# Altium PCB 555-indicator-PCB.PcbDoc
Units mil, origin at the board's own origin, x right, y up, seen from the top; angles counter-clockwise.
Board outline 1800 x 800 mil, 2 copper layers (Top Layer, Bottom Layer); 21 components, 16 nets, 53 pads, 9 vias.
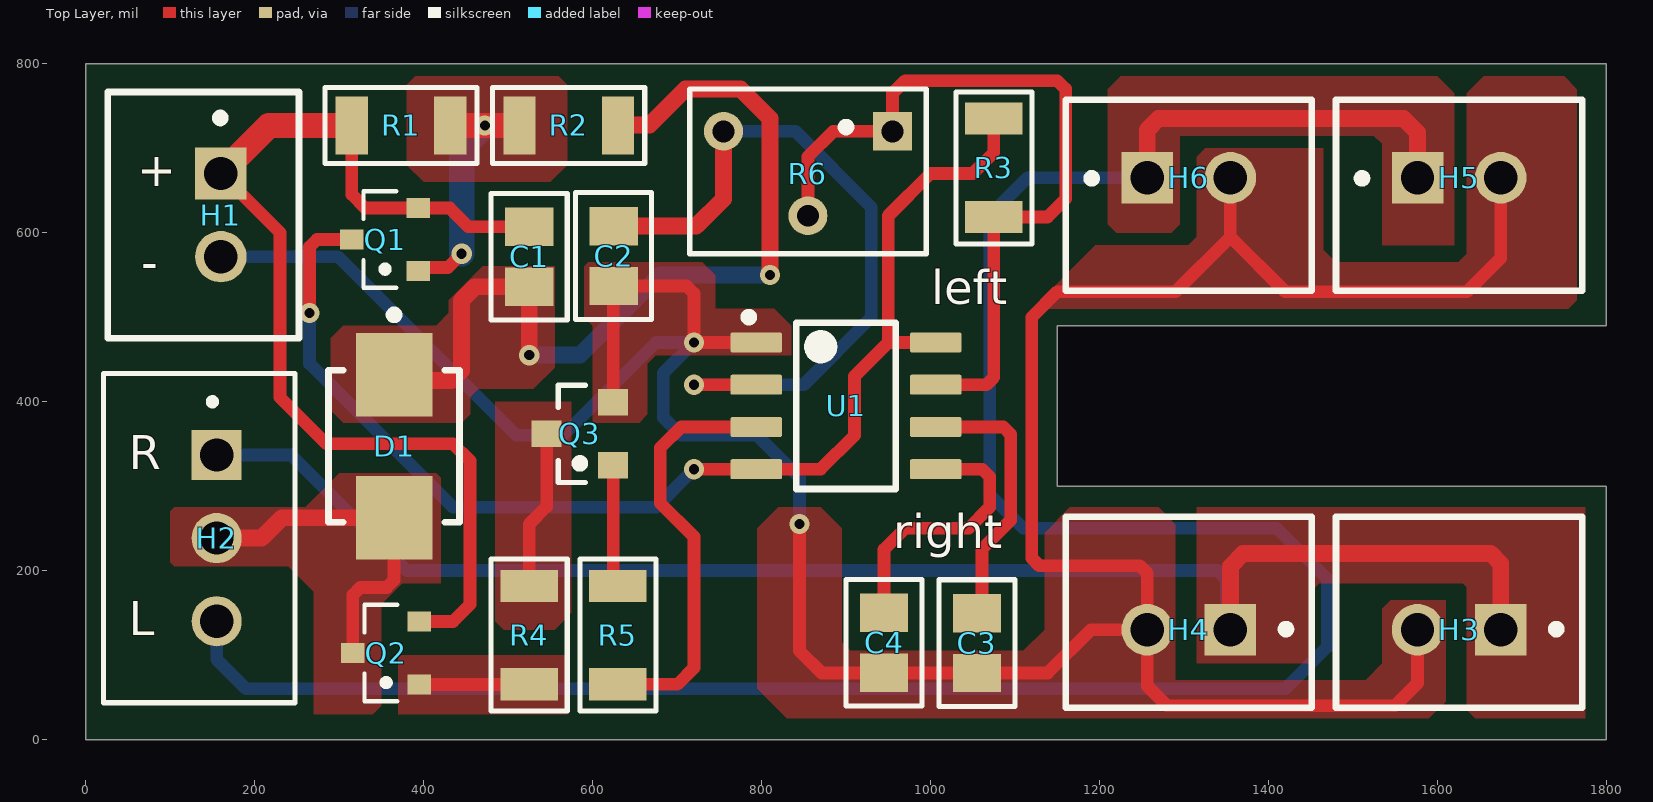
[diagram p0: Top Layer view]
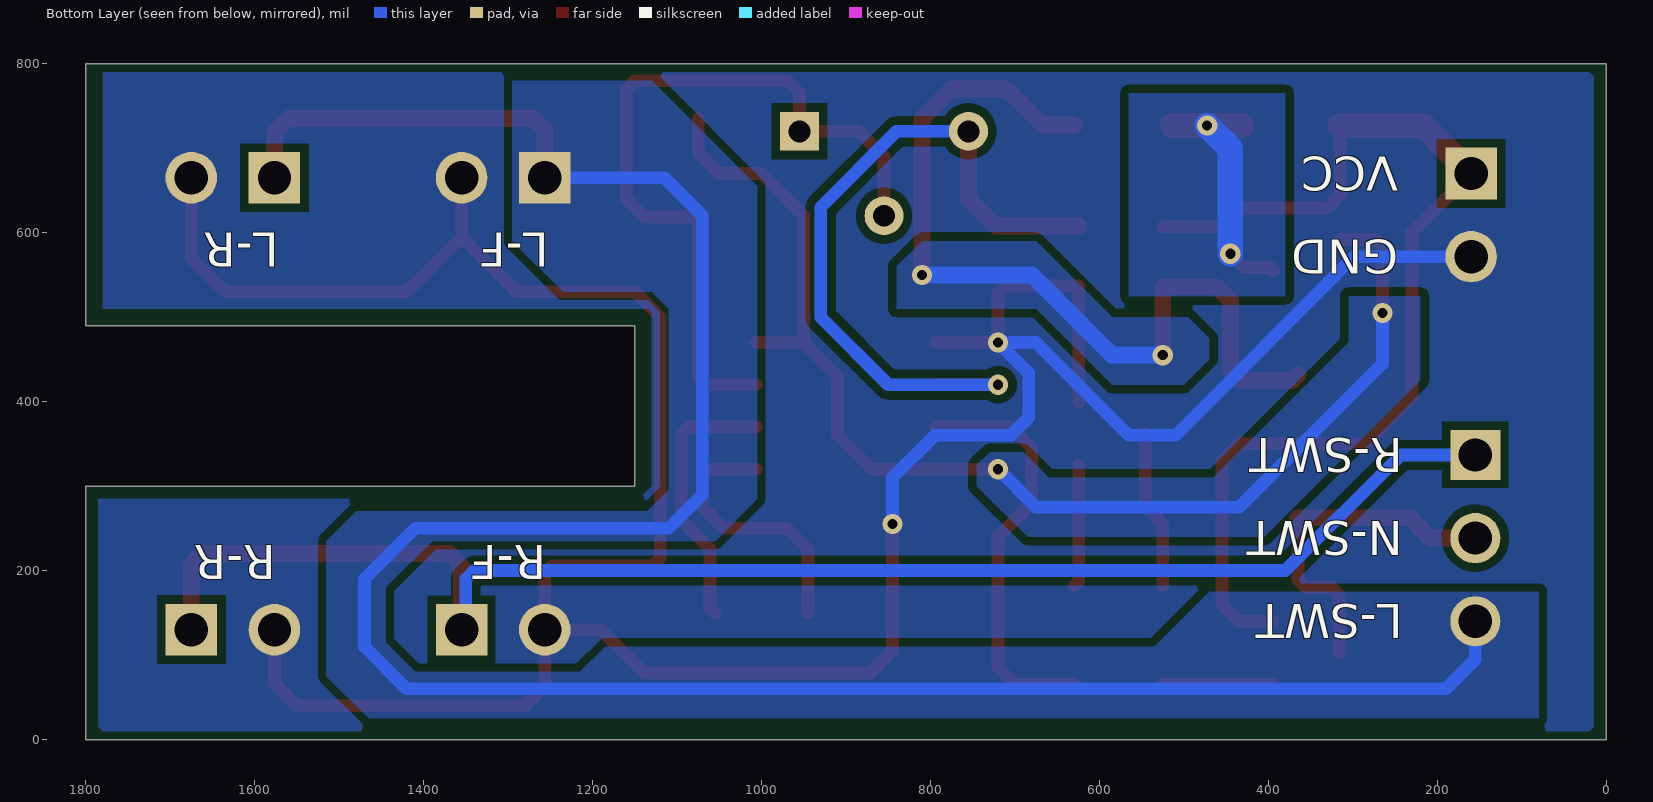
[diagram p1: Bottom Layer view, seen from below]
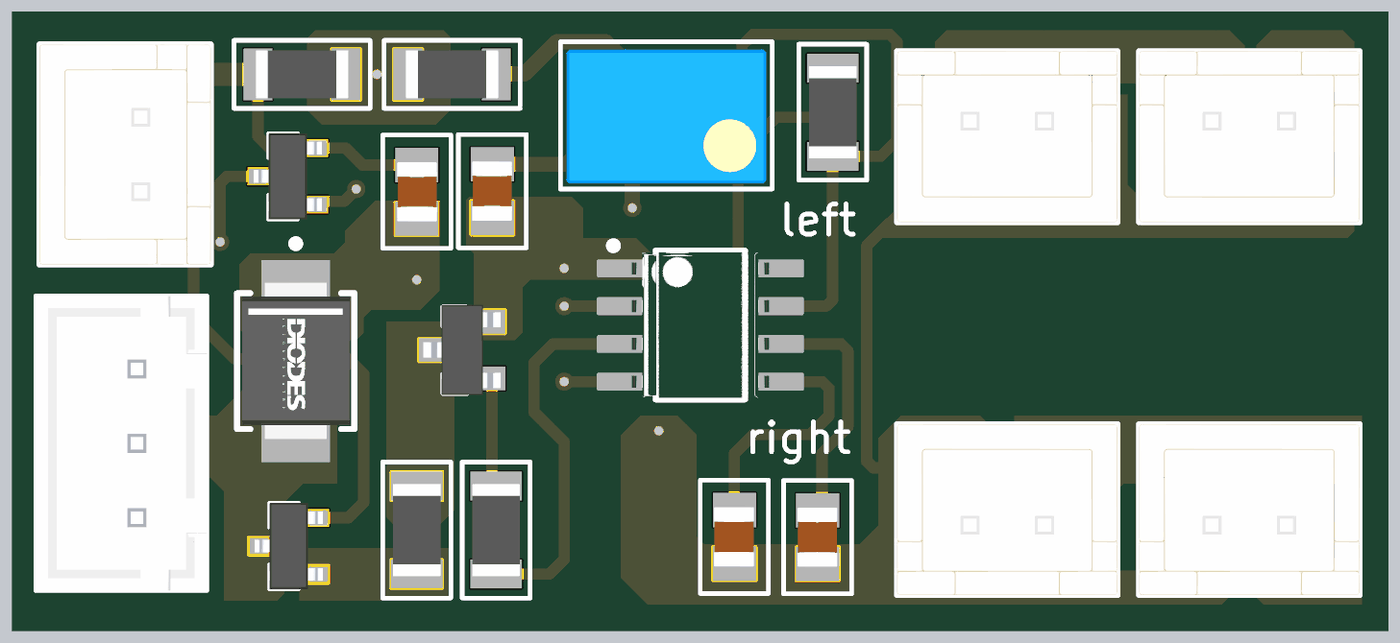
[diagram p2: 3D render of the assembled board from above, using the file's embedded part models]

## Layer stack, top to bottom
Top Solder: solder mask 0.4, Solder Resist, Dk 3.5
Top Layer: signal copper 1.4
Dielectric 1: dielectric 12.6, FR-4, Dk 4.8
Bottom Layer: signal copper 1.4
Bottom Solder: solder mask 0.4, Solder Resist, Dk 3.5

## Board outline
1800,490 1150,490 1150,300 1800,300 1800,0 0,0 0,800 1800,800

## Design rules (kind name [scope] priority, off if disabled: settings)
Clearance [All] p1: gap=10 ignorepadtopadclearanceinfootprint=FALSE
PlaneConnect [All] p1: pad.planeconnectstyle=Relief pad.reliefexpansion=20 pad.reliefentries=4 pad.reliefconductorwidth=10 pad.reliefairgap=10 via.planeconnectstyle=Direct via.reliefexpansion=20 via.reliefentries=4 via.reliefconductorwidth=10 via.reliefairgap=10
PolygonConnect [All] p1: connectstyle=Direct reliefconductorwidth=10 reliefentries=4 polygonreliefangle="90 Angle" airgapwidth=10
RoutingVias [All] p1: holewidth=12 width=24 viastyle="Through Hole" minholewidth=12 minwidth=24 maxholewidth=12 maxwidth=24
SilkToSolderMaskClearance [IsPad] p1: minsilkscreentomaskgap=6 clearancetoexposedcopper=TRUE
SolderMaskExpansion [All] p1: expansion=2 istentingtop=FALSE
SupplyNets "Schematic Supply Nets" [InNet('GND')] p1: voltage=0.000
Width [All] p1: maxlimit=100 minlimit=6 preferedwidth=10 minimp=50.000000 maximp=50.000000 favimp=50.000000
28 further rules are at their usual default settings.

## Components (designator, comment, footprint, x,y, rotation, side; value= is the part's Value field where it differs from the comment)
C1 "10uf, 10V" CAPC2012X140N 525,571.42 r90 top locked value=10uF
C2 "1uF, 25V" CAPC2012X140N 625,572.28 r270 top locked value=1uF
C3 "1uF, 25V" CAPC2012X140N 1055,114.13 r270 top value=1uF
C4 "1uF, 25V" CAPC2012X140N 945,114.57 r270 top value=1uF
D1 "S1AB-13-F" FP-SMB-MFG 365,347.2 r270 top locked
H1 "JST" FP-B2B-XH-A_LF_SN-MFG 139.33,620.79 r270 top
H2 "Rotary SWT" JST_B3B-XH-A 134.33,238.43 r90 top
H3 "JST" FP-B2B-XH-A_LF_SN-MFG 1625.79,150.67 r180 top locked
H4 "JST" FP-B2B-XH-A_LF_SN-MFG 1305.79,150.67 r180 top locked
H5 "JST" FP-B2B-XH-A_LF_SN-MFG 1625.79,644.33 r0 top locked
H6 "JST" FP-B2B-XH-A_LF_SN-MFG 1305.79,644.33 r0 top locked
Q1 "BC857B" PNP_BC857B,235 354.37,591.85 r180 top locked
Q2 "BC857B" PNP_BC857B,235 355.63,102.4 r180 top
Q3 "BCX19LT1G" NPN_BCX19LT1G 585,361.85 r180 top
R1 "39K" RESC3116X65N 373.27,726.85 r0 top
R2 "12K" RESC3116X65N 571.73,726.85 r0 top value=12kR
R3 "50K" RESC3116X65N 1075,676.73 r270 top value=50kR
R4 "47R" RESC3116X65N 525,123.58 r270 top
R5 "47R" RESC3116X65N 630,123.58 r90 top
R6 "50K" TRIM_3266W-1-503LF 855,720 r180 top value=50kR
U1 "NE555DR" FP-D0008A-MFG 900,395 r0 top

## Footprints (in the part's own frame and the unit in brackets; to place one, negate y for a bottom-side part, rotate by r counter-clockwise, add the part's x,y. Pads: shape width x height; smd on the part's side, far side on the other; paste and mask are expansions set on the pad)
CAPC2012X140N [mm]
  rect 1.15x1.45 smd: 1(-0.9,0) 2(0.9,0)
  silkscreen extent -1.9,-1.14 1.91,1.14, body extent -1,-0.69 1,0.66, height 1.26
FP-B2B-XH-A_LF_SN-MFG [mm]
  rect 1.55x1.55 hole 1 paste-2539.97 mask+0: 1(-1.25,0.525)
  round 1.55 hole 1 paste-2539.97 mask+0: 2(1.25,0.525)
  silkscreen extent -3.7,-2.88 3.7,2.88, body extent -3.7,-2.88 3.7,2.88, height 7
FP-D0008A-MFG [mm]
  rrect17% 1.55x0.6 smd paste+0 mask+0: 1(-2.7,1.905) 2(-2.7,0.635) 3(-2.7,-0.635) 4(-2.7,-1.905) 5(2.7,-1.905) 6(2.7,-0.635) 7(2.7,0.635) 8(2.7,1.905)
  silkscreen extent -3.05,-2.5 1.5,2.79, body extent -3.57,-2.75 3.57,2.75, height 0.25
FP-SMB-MFG [mm]
  rect 2.5x2.3 smd paste+0 mask+0: 1(-2.15,0) 2(2.15,0)
  silkscreen extent -4.07,-1.97 2.28,1.97, body extent -3.5,-2.07 3.5,2.07, height 0.25
JST_B3B-XH-A [mm]
  rect 1.508x1.508 / inner round 1.508 / far side rect 1.508x1.508 hole 1: 1(2.5,-0.525)
  round 1.508 hole 1: 2(0,-0.525) 3(-2.5,-0.525)
  silkscreen extent -4.95,-2.88 4.95,2.88, body extent -4.95,-2.88 4.95,2.88, height 7
NPN_BCX19LT1G [mm] "SOT23, 3-Leads, Body 2.92x1.3mm, Pitch 0.95mm"
  rect 0.9x0.8 smd: 1(-1,0.95) 2(-1,-0.95) 3(1,0)
  silkscreen extent -0.17,-1.46 0.65,1.46, body extent -1.3,-1.53 1.3,1.52, height 1.3
PNP_BC857B,235 [mm]
  rect 0.7x0.6 smd paste-0.05: 1(-1,0.95) 2(-1,-0.95) 3(1,0)
  silkscreen extent -0.34,-1.45 0.65,1.45, body extent -1.15,-1.45 1.15,1.45, height 1.1
RESC3116X65N [mm]
  rect 0.97x1.73 smd: 1(-1.48,0) 2(1.48,0)
  silkscreen extent -2.29,-1.14 2.29,1.14, body extent -1.55,-0.8 1.55,0.8, height 0.65
TRIM_3266W-1-503LF [mm]
  rect 1.168x1.168 hole 0.66: 1(-2.54,0)
  round 1.168 hole 0.66: 2(0,2.54) 3(2.54,0)
  silkscreen extent -3.56,-1.27 3.56,3.68, body extent -3.35,-1.01 3.35,3.49, height 8.76

## Part data
C1: library part CL21A106KPFNNNE, "CAP CER 10UF 10V X5R 0805", Capacitor Type=Ceramic, Case/Package=0805, LCSC part no=C17024, Manufacturer=Samsung, Max Operating Temperature=85°C, Min Operating Temperature=-55°C, Package Shape=Rectangular, Package Style=SMTMeter, Rated DC Voltage (URdc)=10V, Supplier Part Number=1276-1052-6-ND, Temperature Characteristics Code=X5R, Tolerance  (fill in as +-)=10%, Category="Ceramic Capacitors", ComponentLink1Description=https://datasheet.ciiva.com:443/pdfs/VipMasterIC/IC/SEMS/SEMS-S-A0008526420/SEMS-S-A0008526398-1.pdf?src-supplier=IHS+Markit, ComponentLink1URL=https://datasheet.ciiva.com:443/pdfs/VipMasterIC/IC/SEMS/SEMS-S-A0008526420/SEMS-S-A0008526398-1.pdf?src-supplier=IHS+Markit, ComponentLink2Description=https://datasheet.ciiva.com/16199/cl05b104kq5nnnc-16199024.pdf?src-supplier=Future+Electronics, ComponentLink2URL=https://datasheet.ciiva.com/16199/cl05b104kq5nnnc-16199024.pdf?src-supplier=Future+Electronics, ComponentLink3Description=https://datasheet.ciiva.com/15195/getdatasheetpartid-357423-15195857.pdf?src-supplier=Verical, ComponentLink3URL=https://datasheet.ciiva.com/15195/getdatasheetpartid-357423-15195857.pdf?src-supplier=Verical, ComponentLink4Description=https://datasheet.octopart.com/CL21A106KPFNNNE-Samsung-Electro-Mechanics-datasheet-136031801.pdf?src-supplier=Farnell, ComponentLink4URL=https://datasheet.octopart.com/CL21A106KPFNNNE-Samsung-Electro-Mechanics-datasheet-136031801.pdf?src-supplier=Farnell, ComponentLink5Description=https://datasheet.octopart.com/CL21A106KPFNNNE-Samsung-Electro-Mechanics-datasheet-8324245.pdf, ComponentLink5URL=https://datasheet.octopart.com/CL21A106KPFNNNE-Samsung-Electro-Mechanics-datasheet-8324245.pdf, ComponentLink6Description=https://datasheet.octopart.com/CL21A106KPFNNNE-Samsung-Electro-Mechanics-datasheet-97040617.pdf, ComponentLink6URL=https://datasheet.octopart.com/CL21A106KPFNNNE-Samsung-Electro-Mechanics-datasheet-97040617.pdf, ComponentLink7Description=https://datasheet.octopart.com/General-Multilayer-Ceramic-Capacitors-Samsung-datasheet-family-111.pdf, ComponentLink7URL=https://datasheet.octopart.com/General-Multilayer-Ceramic-Capacitors-Samsung-datasheet-family-111.pdf, ComponentLink8Description=https://datasheet.octopart.com/CL21A106KPFNNNE-Samsung-Electro-Mechanics-datasheet-110326887.pdf?src-supplier=Future+Electronics, ComponentLink8URL=https://datasheet.octopart.com/CL21A106KPFNNNE-Samsung-Electro-Mechanics-datasheet-110326887.pdf?src-supplier=Future+Electronics, ComponentLink9Description=https://datasheet.octopart.com/CL21A106KPFNNNE-Samsung-Electro-Mechanics-datasheet-81462124.pdf?src-supplier=Future+Electronics, ComponentLink9URL=https://datasheet.octopart.com/CL21A106KPFNNNE-Samsung-Electro-Mechanics-datasheet-81462124.pdf?src-supplier=Future+Electronics, ComponentLink10Description=https://datasheet.octopart.com/CL21A106KPFNNNE-Samsung-datasheet-48647544.pdf?src-supplier=Future+Electronics, ComponentLink10URL=https://datasheet.octopart.com/CL21A106KPFNNNE-Samsung-datasheet-48647544.pdf?src-supplier=Future+Electronics, ComponentLink11Description=https://datasheet.octopart.com/CL21A106KPFNNNE-Samsung-datasheet-26669229.pdf?src-supplier=Future+Electronics, ComponentLink11URL=https://datasheet.octopart.com/CL21A106KPFNNNE-Samsung-datasheet-26669229.pdf?src-supplier=Future+Electronics, ComponentLink12Description=https://datasheet.octopart.com/CL21A106KPFNNNE-Samsung-datasheet-22147434.pdf?src-supplier=TME, ComponentLink12URL=https://datasheet.octopart.com/CL21A106KPFNNNE-Samsung-datasheet-22147434.pdf?src-supplier=TME, ComponentLink13Description=https://datasheet.octopart.com/CL21A106KPFNNNE-Samsung-Electro-Mechanics-datasheet-11781485.pdf?src-supplier=Arrow+Electronics, ComponentLink13URL=https://datasheet.octopart.com/CL21A106KPFNNNE-Samsung-Electro-Mechanics-datasheet-11781485.pdf?src-supplier=Arrow+Electronics, Dielectric Material=Ceramic, Height=1.35mm, JESD-609 Code=e3, Length=2mm, Manufacturer Part Number=CL21A106KPFNNNE, Mounting Technology="Surface Mount", Multilayer=Yes, Packaging="Tape and Reel", Pins=2, Pricing="1=0.1, 10=0.054, 50=0.0374, 100=0.0322, 500=0.02334, 1000=0.0206 (USD)", Reach SVHC Compliant=Yes, RoHS Compliant=Yes, Stock=539282, Supplier=Digikey, Terminal Finish=Nickel, Termination=Wraparound, Tolerance (fill in as +-)=10%, Width=1.25mm
C2 C3 C4: library part CL21B105KAFNNNE, "CAP CER 1UF 25V X7R 0805", Capacitor Type=Ceramic, Case/Package=0805, LCSC part no=C116352, Manufacturer=Samsung, Max Operating Temperature=125°C, Min Operating Temperature=-55°C, Package Shape=Rectangular, Package Style=SMTMeter, Rated DC Voltage (URdc)=25V, Supplier Part Number=1276-1066-6-ND, Temperature Characteristics Code=X7R, Tolerance  (fill in as +-)=10%, Category="Ceramic Capacitors", ComponentLink1Description=https://datasheet.ciiva.com:443/pdfs/VipMasterIC/IC/SEMS/SEMS-S-A0008523501/SEMS-S-A0008523563-1.pdf?src-supplier=IHS+Markit, ComponentLink1URL=https://datasheet.ciiva.com:443/pdfs/VipMasterIC/IC/SEMS/SEMS-S-A0008523501/SEMS-S-A0008523563-1.pdf?src-supplier=IHS+Markit, ComponentLink2Description=https://datasheet.ciiva.com/25800/cl21b105kafnnne-25800163.pdf?src-supplier=Digikey, ComponentLink2URL=https://datasheet.ciiva.com/25800/cl21b105kafnnne-25800163.pdf?src-supplier=Digikey, ComponentLink3Description=https://datasheet.ciiva.com/15195/getdatasheetpartid-355205-15195880.pdf?src-supplier=Verical, ComponentLink3URL=https://datasheet.ciiva.com/15195/getdatasheetpartid-355205-15195880.pdf?src-supplier=Verical, Dielectric Material=Ceramic, Height=1.35mm, JESD-609 Code=e3, Length=2mm, Manufacturer Part Number=CL21B105KAFNNNE, Mounting Technology="Surface Mount", Multilayer=Yes, Packaging="Tape and Reel", Pins=2, Pricing="1=0.08, 10=0.027, 50=0.022, 100=0.0168, 500=0.0152, 1000=0.0136 (USD)", Reach SVHC Compliant=Yes, RoHS=Yes, RoHS Compliant=Yes, Stock=1459194, Supplier=Digikey, Terminal Finish=Nickel, Termination=Wraparound, Tolerance (fill in as +-)=10%, Width=1.25mm
D1: "DIODE GEN PURP 50V 1A DO214AC", Forward Voltage=1.1V, LCSC part no=C519094, Manufacturer=Diodes, Max Operating Temperature=150°C, Max Output current=1A, Min Operating Temperature=-65°C, Non-rep Pk Forward Current-Max=30A, Package Body Material=Plastic, Package Shape=Rectangular, Package Style="SMALL OUTLINEMeter", Peak Reflow Temperature (Cel)=260°C, Rep Pk Reverse Voltage-Max=50V, Supplier Part Number=S1AB-FDICT-ND, Time @ Peak Reflow Temperature-Max (s)=40s, Additional Feature="HIGH RELIABILITY", Category="Rectifier Diodes", ComponentLink1Description=https://datasheet.ciiva.com:443/pdfs/VipMasterIC/IC/DIOD/DIOD-S-A0007810797/DIOD-S-A0007810797-1.pdf?src-supplier=IHS+Markit, ComponentLink1URL=https://datasheet.ciiva.com:443/pdfs/VipMasterIC/IC/DIOD/DIOD-S-A0007810797/DIOD-S-A0007810797-1.pdf?src-supplier=IHS+Markit, Diode Element Material=SILICON, Diode Type=RECTIFIER, JESD-30 Code=R-PDSO-C2, JESD-609 Code=e3, Manufacturer Part Number=S1AB-13-F, Moisture Sensitivity Level=1, Number of Elements=1, Pins=2, Pricing="1=0.18, 10=0.121, 100=0.0813, 500=0.06208, 1000=0.05559 (USD)", Qualification Status="Not Qualified", Reach SVHC Compliant=No, Reverse Recovery Time-Max=3us, RoHS=Yes, RoHS Compliant=Yes, Stock=182225, Supplier=Digikey, Surface Mount=Yes, Terminal Finish=Tin, Terminal Form="C BEND", Terminal Position=DUAL
H1 H3 H4 H5 H6: library part B2B-XH-A(LF)(SN), "CONN HEADER VERT 2POS 2.5MM", LCSC part no=C158012, Supplier Part Number=1638840, Category="Headers and Wire Housings", ComponentLink1Description=https://datasheet.ciiva.com/11746/0900766b8082653e-11746979.pdf?src-supplier=Rs, ComponentLink1URL=https://datasheet.ciiva.com/11746/0900766b8082653e-11746979.pdf?src-supplier=Rs, ComponentLink2Description=https://datasheet.ciiva.com/26894/getdatasheetpartid-640357-26894434.pdf?src-supplier=Verical, ComponentLink2URL=https://datasheet.ciiva.com/26894/getdatasheetpartid-640357-26894434.pdf?src-supplier=Verical, ComponentLink3Description=https://datasheet.ciiva.com/26894/getdatasheetpartid-385291-26894760.pdf?src-supplier=Verical, ComponentLink3URL=https://datasheet.ciiva.com/26894/getdatasheetpartid-385291-26894760.pdf?src-supplier=Verical, ComponentLink4Description=https://datasheet.ciiva.com/8052/5448-8052024.pdf?src-supplier=Element14, ComponentLink4URL=https://datasheet.ciiva.com/8052/5448-8052024.pdf?src-supplier=Element14, Manufacturer=JST, Manufacturer Part Number=B2B-XH-A(LF)(SN), Pricing="1=0.0563, 750=0.0541, 2500=0.0518, 7500=0.0498, 25000=0.0458 (USD)", RoHS=Yes, Stock=668373, Supplier="Future Electronics"
H2: library part B3B-XH-A(LF)(SN), "CONN HEADER VERT 3POS 2.5MM", LCSC part no=C144394, Manufacturer=JST, Supplier Part Number=8262735, Category="Headers and Wire Housings", ComponentLink1Description=https://datasheet.ciiva.com/11746/0900766b8082653f-11746520.pdf?src-supplier=Rs, ComponentLink1URL=https://datasheet.ciiva.com/11746/0900766b8082653f-11746520.pdf?src-supplier=Rs, ComponentLink2Description=https://datasheet.ciiva.com/26894/getdatasheetpartid-640434-26894454.pdf?src-supplier=Verical, ComponentLink2URL=https://datasheet.ciiva.com/26894/getdatasheetpartid-640434-26894454.pdf?src-supplier=Verical, ComponentLink3Description=https://datasheet.ciiva.com/26894/getdatasheetpartid-440399-26894778.pdf?src-supplier=Verical, ComponentLink3URL=https://datasheet.ciiva.com/26894/getdatasheetpartid-440399-26894778.pdf?src-supplier=Verical, Manufacturer Part Number=B3B-XH-A(LF)(SN), Pricing="1=0.0792, 500=0.0757, 1500=0.0727, 5000=0.0695, 15000=0.0637 (USD)", RoHS=Yes, Stock=57931, Supplier="Future Electronics"
Q1 Q2: "BJT SOT-23 45V 100MA", LCSC part no=C181146, Manufacturer=Infineon, Supplier Part Number=BC857BE6327HTSA1CT-ND, Manufacturer Part Number=BC857B, Pricing="1=0.23, 10=0.14, 100=0.0872, 500=0.06382, 1000=0.05625 (USD)", RoHS=Yes, Stock=18586, Supplier=Digikey
Q3: "TRANS NPN 45V 0.5A SOT23-3", Collector-emitter Voltage-Max=45V, DC Current Gain-Min (hFE)=40, LCSC part no=C232541, Manufacturer="ON Semiconductor", Max Collector Current=500mA, Max Operating Temperature=150°C, Package Body Material=Plastic, Package Shape=Rectangular, Package Style="SMALL OUTLINEMeter", Peak Reflow Temperature (Cel)=260°C, Power Dissipation-Max (Abs)=225mW, Supplier Part Number=BCX19LT1GOSCT-ND, Time @ Peak Reflow Temperature-Max (s)=40s, Category=BJTs, ComponentLink1Description=https://datasheet.ciiva.com:443/pdfs/VipMasterIC/IC/ONSM/ONSMS38866/ONSMS38866-1.pdf?src-supplier=IHS+Markit, ComponentLink1URL=https://datasheet.ciiva.com:443/pdfs/VipMasterIC/IC/ONSM/ONSMS38866/ONSMS38866-1.pdf?src-supplier=IHS+Markit, ComponentLink2Description=https://datasheet.ciiva.com/15138/getdatasheetpartid-38785-15138642.pdf?src-supplier=Verical, ComponentLink2URL=https://datasheet.ciiva.com/15138/getdatasheetpartid-38785-15138642.pdf?src-supplier=Verical, ComponentLink3Description=https://datasheet.ciiva.com/976/bcx17lt1-d-976538.pdf?src-supplier=Digikey, ComponentLink3URL=https://datasheet.ciiva.com/976/bcx17lt1-d-976538.pdf?src-supplier=Digikey, ComponentLink4Description=https://datasheet.ciiva.com/976/bcx17lt1-d-976539.pdf?src-supplier=Digikey, ComponentLink4URL=https://datasheet.ciiva.com/976/bcx17lt1-d-976539.pdf?src-supplier=Digikey, ComponentLink5Description=https://datasheet.ciiva.com/976/bcx17lt1-d-976540.pdf?src-supplier=Digikey, ComponentLink5URL=https://datasheet.ciiva.com/976/bcx17lt1-d-976540.pdf?src-supplier=Digikey, ComponentLink6Description=https://datasheet.ciiva.com/11204/bcx17lt1-d-11204428.pdf?src-supplier=Avnet, ComponentLink6URL=https://datasheet.ciiva.com/11204/bcx17lt1-d-11204428.pdf?src-supplier=Avnet, JEDEC-95 Code=TO-236AB, JESD-30 Code=R-PDSO-G3, JESD-609 Code=e3, Manufacturer Part Number=BCX19LT1G, Moisture Sensitivity Level=1, Number of Elements=1, Pins=3, Polarity/Channel Type=NPN, Pricing="1=0.12, 10=0.085, 100=0.0569, 500=0.04318, 1000=0.03851 (USD)", Qualification Status="Not Qualified", Reach SVHC Compliant=Yes, RoHS=Yes, RoHS Compliant=Yes, Stock=4512, Supplier=Digikey, Surface Mount=Yes, Terminal Finish=Tin, Terminal Form="Gull Wing", Terminal Position=DUAL, Transistor Element Material=SILICON
R1: library part ERJ-PB6B3902V, "Res SMD 39K Ohm 0.1% 1/4W 0805", LCSC part no=C4158317, Manufacturer=Panasonic, Supplier Part Number=P20774CT-ND, Category="Chip SMD Resistors", ComponentLink1Description=http://datasheet.octopart.com/ERJPB6B3902V-Panasonic-datasheet-82522998.pdf?src-supplier=Farnell, ComponentLink1URL=http://datasheet.octopart.com/ERJPB6B3902V-Panasonic-datasheet-82522998.pdf?src-supplier=Farnell, ComponentLink2Description=https://datasheet.octopart.com/ERJ-PB6B3902V-Panasonic-datasheet-82522998.pdf?src-supplier=Newark, ComponentLink2URL=https://datasheet.octopart.com/ERJ-PB6B3902V-Panasonic-datasheet-82522998.pdf?src-supplier=Newark, ComponentLink3Description=http://datasheet.octopart.com/ERJPB6B3902V-Panasonic-datasheet-82522998.pdf?src-supplier=Verical, ComponentLink3URL=http://datasheet.octopart.com/ERJPB6B3902V-Panasonic-datasheet-82522998.pdf?src-supplier=Verical, ComponentLink4Description=https://industrial.panasonic.com/cdbs/www-data/pdf/RDM0000/AOA0000C328.pdf?src-supplier=Digikey, ComponentLink4URL=https://industrial.panasonic.com/cdbs/www-data/pdf/RDM0000/AOA0000C328.pdf?src-supplier=Digikey, Manufacturer Part Number=ERJ-PB6B3902V, Pricing="1=0.29, 10=0.161, 25=0.1292, 50=0.1098, 100=0.0939, 250=0.07684, 500=0.06644, 1000=0.05775 (USD)", RoHS=Yes, Stock=9918, Supplier=Digikey
R2: library part ERJPB6B1202V, "RES SMD 12K OHM 0.1% 1/4W 0805", Case/Package=0805, LCSC part no=C413717, Manufacturer=Panasonic, Max Operating Temperature=155°C, Min Operating Temperature=-55°C, Package Height=0.6mm, Package Length=2mm, Package Width=1.25mm, Power=250mW, Rated Temperature=70°C, Resistor Type="FIXED RESISTOR", Supplier Part Number=P20716CT-ND, Temperature Coefficient=50ppm/°C, Tolerance=0.1%, Working Voltage=150V, Category="Chip SMD Resistors", ComponentLink1Description=https://datasheet.ciiva.com:443/pdfs/VipMasterIC/IC/PANA/PANA-S-A0009891633/PANA-S-A0009891633-1.pdf?src-supplier=IHS+Markit, ComponentLink1URL=https://datasheet.ciiva.com:443/pdfs/VipMasterIC/IC/PANA/PANA-S-A0009891633/PANA-S-A0009891633-1.pdf?src-supplier=IHS+Markit, ComponentLink2Description=https://datasheet.octopart.com/ERJPB6B1202V-Panasonic-datasheet-82522998.pdf?src-supplier=Newark, ComponentLink2URL=https://datasheet.octopart.com/ERJPB6B1202V-Panasonic-datasheet-82522998.pdf?src-supplier=Newark, ComponentLink3Description=https://industrial.panasonic.com/cdbs/www-data/pdf/RDM0000/AOA0000C328.pdf?src-supplier=Digikey, ComponentLink3URL=https://industrial.panasonic.com/cdbs/www-data/pdf/RDM0000/AOA0000C328.pdf?src-supplier=Digikey, ComponentLink4Description=https://datasheet.octopart.com/ERJPB6B1202V-Panasonic-datasheet-136610817.pdf?src-supplier=Newark, ComponentLink4URL=https://datasheet.octopart.com/ERJPB6B1202V-Panasonic-datasheet-136610817.pdf?src-supplier=Newark, ComponentLink5Description=https://datasheet.octopart.com/ERJPB6B1202V-Panasonic-datasheet-177212511.pdf?src-supplier=Burklin+Elektronik, ComponentLink5URL=https://datasheet.octopart.com/ERJPB6B1202V-Panasonic-datasheet-177212511.pdf?src-supplier=Burklin+Elektronik, Construction=Rectangular, Manufacturer Part Number=ERJPB6B1202V, Mounting Technology="Surface Mount", Packaging="Tape and Reel", Pins=2, Pricing="1=0.29, 10=0.161, 25=0.1292, 50=0.1098, 100=0.0939, 250=0.07684, 500=0.06644, 1000=0.05775 (USD)", Reach SVHC Compliant=Yes, Reference Standard=AEC-Q200, RoHS Compliant=Yes, Stock=15534, Supplier=Digikey, Technology="METAL GLAZE/THICK FILM", Termination=Wraparound
R3: library part RT1206BRD0750KL, "RES SMD 50K OHM 0.1% 1/4W 1206", Case/Package=1206, LCSC part no=C706417, Manufacturer=Yageo, Max Operating Temperature=155°C, Min Operating Temperature=-55°C, Package Shape=Rectangular, Power=250mW, Rated Temperature=70°C, Resistor Type="FIXED RESISTOR", Supplier Part Number=13-RT1206BRD0750KLCT-ND, Temperature Coefficient=25ppm/°C, Tolerance=0.1%, Working Voltage=200V, Additional Feature="LASER TRIMMABLE", Category="Chip SMD Resistors", ComponentLink1Description=https://datasheet.ciiva.com:443/pdfs/VipMasterIC/IC/YAGO/YAGO-S-A0003507815/YAGO-S-A0003507815-1.pdf?src-supplier=IHS+Markit, ComponentLink1URL=https://datasheet.ciiva.com:443/pdfs/VipMasterIC/IC/YAGO/YAGO-S-A0003507815/YAGO-S-A0003507815-1.pdf?src-supplier=IHS+Markit, ComponentLink2Description=https://datasheet.octopart.com/RT1206BRD0750KL-Yageo-datasheet-166250672.pdf?src-supplier=Future+Electronics, ComponentLink2URL=https://datasheet.octopart.com/RT1206BRD0750KL-Yageo-datasheet-166250672.pdf?src-supplier=Future+Electronics, ComponentLink3Description=http://www.yageo.com/documents/recent/PYu-RT_1-to-0.01_RoHS_L_8.pdf?src-supplier=Digikey, ComponentLink3URL=http://www.yageo.com/documents/recent/PYu-RT_1-to-0.01_RoHS_L_8.pdf?src-supplier=Digikey, Manufacturer Part Number=RT1206BRD0750KL, Mounting Technology="Surface Mount", Packaging="Tape and Reel", Pins=2, Pricing="1=0.34, 10=0.246, 50=0.1908, 100=0.1693, 500=0.1275, 1000=0.1122 (USD)", Reach SVHC Compliant=Yes, RoHS=Yes, RoHS Compliant=Yes, Stock=21777, Supplier=Digikey, Technology="THIN FILM", Termination=Wraparound
R4 R5: library part RPC0805JT47R0, "RES 47 OHM 5% 1/4W 0805", Case/Package=0805, LCS part no=C5869749, Manufacturer="Stackpole Electronics", Max Operating Temperature=155°C, Min Operating Temperature=-55°C, Package Height=0.5mm, Package Length=2mm, Package Shape=Rectangular, Package Width=1.25mm, Power=250mW, Rated Temperature=70°C, Resistor Type="FIXED RESISTOR", Supplier Part Number=RPC0805JT47R0DKR-ND, Temperature Coefficient=200ppm/°C, Tolerance=5%, Working Voltage=150V, Category="Chip SMD Resistors", ComponentLink1Description=https://datasheet.ciiva.com:443/pdfs/VipMasterIC/IC/SEIE/SEIE-S-A0010122904/SEIE-S-A0010122904-1.pdf?src-supplier=IHS+Markit, ComponentLink1URL=https://datasheet.ciiva.com:443/pdfs/VipMasterIC/IC/SEIE/SEIE-S-A0010122904/SEIE-S-A0010122904-1.pdf?src-supplier=IHS+Markit, ComponentLink2Description=https://www.seielect.com/Catalog/SEI-rpc.pdf?src-supplier=Digikey, ComponentLink2URL=https://www.seielect.com/Catalog/SEI-rpc.pdf?src-supplier=Digikey, ComponentLink3Description=https://www.seielect.com/catalog/SEI-Packaging.pdf?src-supplier=Digikey, ComponentLink3URL=https://www.seielect.com/catalog/SEI-Packaging.pdf?src-supplier=Digikey, Construction=Rectangular, JESD-609 Code=e3, LCSC part no=C5869749, Manufacturer Part Number=RPC0805JT47R0, Mounting Technology="Surface Mount", Packaging="Tape and Reel", Pins=2, Pricing="1=0.17, 10=0.087, 50=0.058, 100=0.0494, 500=0.03554, 1000=0.03137 (USD)", Reach SVHC Compliant=Yes, Reference Standard=AEC-Q200, RoHS=Yes, RoHS Compliant=Yes, Stock=55267, Supplier=Digikey, Technology="METAL GLAZE/THICK FILM", Terminal Finish=Nickel, Termination=Wraparound
R6: library part "3266W-1-503LF (2)", "50K OHM 0.25W PC PIN TOP", Case/Package=2618, LCSC part no=C780226, Manufacturer=Bourns, Manufacturer Part Number=3266W-1-503LF, Max Operating Temperature=150°C, Min Operating Temperature=-55°C, Package Height=6.85mm, Package Length=6.71mm, Package Shape=Rectangular, Package Width=4.5mm, Power=250mW, Rated Temperature=70°C, Resistance Law=Linear, Resistor Type=TRIMMER, Supplier Part Number=3266W-503LF-ND, Temperature Coefficient=-100100ppm/°C, Tolerance=10%, Actuator Orientation=Vertical, Actuator Type=SCREW, Category="Variable Resistors and Potentiometers", ComponentLink1Description=https://datasheet.ciiva.com:443/pdfs/VipMasterIC/IC/BOUR/BOUR-S-A0008901203/BOUR-S-A0008901203-1.pdf?src-supplier=IHS+Markit, ComponentLink1URL=https://datasheet.ciiva.com:443/pdfs/VipMasterIC/IC/BOUR/BOUR-S-A0008901203/BOUR-S-A0008901203-1.pdf?src-supplier=IHS+Markit, ComponentLink2Description=https://datasheet.ciiva.com/29122/447254-da-01-en-trimmer-tht-3266w-1-503lf-50k-0-25w-29122338.pdf?src-supplier=Conrad, ComponentLink2URL=https://datasheet.ciiva.com/29122/447254-da-01-en-trimmer-tht-3266w-1-503lf-50k-0-25w-29122338.pdf?src-supplier=Conrad, ComponentLink3Description=https://datasheet.ciiva.com/2156/3266-2156991.pdf?src-supplier=Digikey, ComponentLink3URL=https://datasheet.ciiva.com/2156/3266-2156991.pdf?src-supplier=Digikey, Construction="Trimmer Pot", JESD-609 Code=e3, Lead Diameter=0.46mm, Lead Length=4.88mm, Mounting Technology="Through Hole", Number of Turns=12, Packaging=Rail/Tube, Pins=3, Pricing="1=4.17, 10=3.35, 25=3.0676, 50=2.869, 100=2.6824, 250=2.45264, 500=2.29082, 1000=2.13862, 5000=1.81904 (USD)", Reach SVHC Compliant=No, RoHS=Yes, RoHS Compliant=Yes, Rotational Angle=4320°, Stock=1328, Supplier=Digikey, Technology=CERMET, Terminal Finish=Tin, Termination=Wire
U1: "IC OSC SGL TIMER 100KHZ 8-SOIC", Case/Package=SOP, LCSC part no=C7593, Manufacturer="Texas Instruments", Max Operating Temperature=70°C, Max Supply Voltage=16V, Min Operating Temperature=0°C, Min Supply Voltage=4.5V, Nominal Supply Voltage=5V, Package Body Material=Plastic, Package Equivalence Code=SOP8,.25, Package Shape=Rectangular, Package Style="SMALL OUTLINEMeter", Peak Reflow Temperature (Cel)=260°C, Power Supplies=5/15V, Supplier Part Number=296-6501-1-ND, Temperature Grade=COMMERCIAL, Category="Timers and Oscillators", Channels=1, ComponentLink1Description=https://www.ti.com:443/lit/ds/symlink/na555.pdf?src-supplier=IHS+Markit, ComponentLink1URL=https://www.ti.com:443/lit/ds/symlink/na555.pdf?src-supplier=IHS+Markit, ComponentLink2Description=https://datasheet.ciiva.com/1233/ne555-1233132.pdf?src-supplier=Digikey, ComponentLink2URL=https://datasheet.ciiva.com/1233/ne555-1233132.pdf?src-supplier=Digikey, ComponentLink3Description=https://datasheet.ciiva.com/1233/ne555-1233131.pdf?src-supplier=Digikey, ComponentLink3URL=https://datasheet.ciiva.com/1233/ne555-1233131.pdf?src-supplier=Digikey, ComponentLink4Description=https://datasheet.ciiva.com/1139/1874740-1139901.pdf?src-supplier=Element14, ComponentLink4URL=https://datasheet.ciiva.com/1139/1874740-1139901.pdf?src-supplier=Element14, ComponentLink5Description=https://datasheet.ciiva.com/1233/ne555-1233133.pdf?src-supplier=Digikey, ComponentLink5URL=https://datasheet.ciiva.com/1233/ne555-1233133.pdf?src-supplier=Digikey, ComponentLink6Description=https://datasheet.ciiva.com/46395/1874740-46395978.pdf?src-supplier=Element14, ComponentLink6URL=https://datasheet.ciiva.com/46395/1874740-46395978.pdf?src-supplier=Element14, Height - Seated (Max)=1.75mm, JESD-30 Code=R-PDSO-G8, JESD-609 Code=e3, Length=4.9mm, Manufacturer Part Number=NE555DR, Moisture Sensitivity Level=1, Pins=8, Pricing="1=0.2, 10=0.136, 25=0.1196, 100=0.1018, 250=0.0934, 500=0.08832, 1000=0.08413 (USD)", Qualification Status="Not Qualified", Reach SVHC Compliant=Yes, RoHS=Yes, RoHS Compliant=Yes, Stock=55657, Supplier=Digikey, Surface Mount=Yes, Technology=BIPOLAR, Terminal Finish=Tin, Terminal Form="Gull Wing", Terminal Pitch=1.27mm, Terminal Position=DUAL, Throw Configuration="PULSE; RECTANGULAR", Width=3.9mm

## Via types
v1: diameter 24, hole 12, Top Layer to Bottom Layer, tented both sides, 9 vias

## Nets (pads, with @x,y where several pads share a name; then routed paths per layer and width w, separated by ;. In a path a pad name is that pad's centre, name@x,y a point inside that pad or via, vN(x,y) a via of type N, cw(c..) or ccw(c..) an arc to the next point about the centre after c; other vN are vias at no path point)
GND: C2.2 C3.2 C4.2 H1.2 H3.2 H4.2 H5.2 H6.2 Q3.2 U1.1 | length 3774.6
  Top Layer w15: Q3.2 624.37,536.22 C2.2 711.21,536.85 720,528.06 v1(720,470) U1.1 ; v1(845,255) 845,105 871.3,78.7 C3.2 1138.7,78.7 1190,130 H4.2 ; H6.2 1355,595 ; H3.2 1576.57,66.57 1550,40 1280,40 1256.57,63.43 H4.2 ; H5.2 1675,570 1635,530 1420,530 1355,595 ; H4.2 1256.57,196.97 1247.79,205.76 1128.79,205.76 1120,214.54 1120,500 1150,530 1290,530 1355,595
  Bottom Layer w15: H1.2 298.43,571.57 510,360 565,360 675,470 v1(720,470) 683.71,433.71 683.71,381.29 705,360 795,360 845,310 v1(845,255)
Left: H2.3 H5.1 H6.1 | length 2894.3
  Top Layer w20: H6.1 1256.57,721.57 1270,735 1560,735 1576.57,718.43 H5.1
  Bottom Layer w15: H2.3 155,95 190,60 1420,60 1470,110 1470,190 1410,250 1110,250 1070,290 1070,620 1115,665 H6.1
N: D1.2 H2.2 Q2.3 | length 418.6
  Top Layer w15: Q2.3 316.26,171.21 325.05,180 356.21,180 365,188.79 D1.2
  Top Layer w20: H2.2 208.43,238.43 232.56,262.56 D1.2
NetC1_1: C1.1 D1.1 R2.2 | length 1060.3
  Top Layer w20: D1.1 371.85,425 433.28,425 445,436.72 445,520 460.98,535.98 C1.1 v1(525,455) ; R2.2 630.53,727.38 667.38,727.38 710,770 775,770 810,735 v1(810,550)
  Bottom Layer w20: v1(525,455) 585,455 680,550 v1(810,550)
NetC1_2: C1.2 H1.1 Q1.2 Q2.2 R1.1 | length 1274.6
  Top Layer w15: H1.1 230,600 230,405 285,350 435,350 455,330 455,160 434.8,139.8 Q2.2 ; R1.1 315,645 330.75,629.25 Q1.2 430.75,629.25 453.15,606.85 C1.2
  Top Layer w30: H1.1 216.85,726.85 R1.1
NetC2_1: C2.1 R6.3 U1.2 | length 882.5
  Top Layer w15: v1(720,420) U1.2
  Top Layer w20: C2.1 722.72,607.72 755,640 R6.3
  Bottom Layer w15: v1(720,420) 850,420 930,500 930,630 840,720 R6.3
NetC3_1: C3.1 U1.6 | length 320.6
  Top Layer w15: U1.6 1086.21,370 1095,361.21 1095,259.64 1060.91,225.55 1060.91,155.47 C3.1
NetC4_1: C4.1 U1.5 | length 324.3
  Top Layer w15: C4.1 945,225 970,250 1045,250 1070,275 1070,311.21 1061.21,320 U1.5
NetQ1_1: Q1.1 R1.2 R2.1 | length 304.9
  Top Layer w15: Q1.1 398.05,558.76 428.76,558.76 v1(445,575)
  Top Layer w30: R1.2 v1(472.5,726.85) R2.1
  Bottom Layer w30: v1(445,575) 445,699.35 v1(472.5,726.85)
NetQ1_3: Q1.3 R3.1 U1.4 U1.8 | length 1471.3
  Top Layer w15: v1(265,505) 265,583.06 273.79,591.85 Q1.3 ; v1(720,320) U1.4 870,320 910,360 910,430 950,470 ; U1.8 1000,470 950,470 ; R3.1 1075,695 1050,670 1000,670 950,620 950,470
  Bottom Layer w15: v1(265,505) 265,445 435,275 675,275 v1(720,320)
NetQ2_1: Q2.1 R4.2 | length 130.1
  Top Layer w15: Q2.1 395.16,65.16 524.84,65.16 R4.2
NetQ3_1: Q3.1 R5.2 | length 144.9
  Top Layer w15: Q3.1 624.37,187.48 R5.2
NetQ3_3: Q3.3 R4.1 | length 188.5
  Top Layer w15: R4.1 525,255 545.63,275.63 Q3.3
NetR3_2: R3.2 R6.1 R6.2 U1.7 | length 928.7
  Top Layer w15: R6.2 855,690 885,720 R6.1 955,765 970,780 1150,780 1160,770 1160,640 1138.46,618.46 1088.46,618.46 R3.2 1075,428.79 1066.21,420 U1.7
NetR5_1: R5.1 U1.3 | length 498.8
  Top Layer w15: R5.1 700.32,65.32 720,85 720,240 680,280 680,345 705,370 U1.3
Right: H2.1 H3.1 H4.1 | length 1795.2
  Top Layer w20: H4.1 1355,205 1370,220 1663.28,220 1675,208.28 H3.1
  Bottom Layer w15: H2.1 243.15,336.85 380,200 1340,200 1350,190 H4.1@1350,135

## Polygon pours and split planes (outlines as drawn)
GND on Top Layer "GND_L01_P010" (solid, pour order 10): 1610,165 1610,45 1590,25 830,25 795,60 795,250 820,275 870,275 895,250 895,115 905,105 1110,105 1135,130 1135,245 1165,275 1270,275 1290,255 1290,70 1515,70 1535,90 1535,155 1545,165 1535,155 1545,165
GND on Top Layer "GND_L01_P009" (solid, pour order 9): 590,560 590,500 600,490 600,375 655,375 665,385 665,445 675,455 835,455 835,490 815,510 745,510 745,550 730,565 595,565
NetC1_1 on Top Layer "NETC1_1_L01_P008" (solid, pour order 8): 415,490 430,505 430,520 470,560 555,560 555,440 530,415 465,415 455,405 455,385 445,375 305,375 290,390 290,475 305,490
GND on Top Layer "GND_L01_P007" (solid, pour order 7): 1635,575 1625,565 1480,565 1465,580 1465,700 1325,700 1315,690 1315,595 1305,585 1195,585 1120,510 1755,510 1765,520 1765,770 1750,785 1655,785 1635,765
Left on Top Layer "LEFT_L01_P006" (solid, pour order 6): 1295,715 1525,715 1535,705 1535,585 1620,585 1620,765 1600,785 1225,785 1210,770 1210,610 1220,600 1285,600 1295,610
Right on Top Layer "RIGHT_L01_P005" (solid, pour order 5): 1315,90 1450,90 1450,175 1460,185 1630,185 1635,180 1635,35 1645,25 1775,25 1775,275 1315,275
NetQ1_1 on Top Layer "NETQ1_1_L01_P004" (solid, pour order 4): 380,775 380,680 400,660 550,660 570,680 570,775 560,785 390,785
N on Top Layer "N_L01_P003" (solid, pour order 3): 300,315 260,275 105,275 100,270 100,210 105,205 240,205 270,175 270,30 340,30 350,40 350,160 375,185 420,185 420,310 415,315
NetQ3_3 on Top Layer "NETQ3_3_L01_P002" (solid, pour order 2): 485,140 495,130 555,130 575,150 575,400 485,400
NetQ2_1 on Top Layer "NETQ2_1_L01_P001" (solid, pour order 1): 370,30 570,30 570,100 370,100
GND on Bottom Layer "GND_L02_P015" (solid, pour order 15): 15,785 20,790 1780,790 1780,510 1135,510 1130,505 1130,300 1145,285 1785,285 1785,15 1780,10 20,10 15,15
NetQ1_3 on Bottom Layer "NETQ1_3_L02_P014" (solid, pour order 14): 220,525 220,425 405,240 685,240 745,300 745,325 730,340 690,340 660,310 465,310 305,470 305,525
NetC1_1 on Bottom Layer "NETC1_1_L02_P013" (solid, pour order 13): 810,590 840,560 840,510 675,510 585,420 500,420 470,450 470,475 495,500 585,500 675,590
NetQ1_1 on Bottom Layer "NETQ1_1_L02_P012" (solid, pour order 12): 380,765 565,765 565,525 380,525
Left on Bottom Layer "LEFT_L02_P011" (solid, pour order 11): 80,175 470,175 535,110 1185,110 1215,80 1410,80 1445,115 1445,180 1390,235 1055,235 1005,285 1005,655 1130,780 1295,780 1295,590 1235,530 1130,530 1110,510 1110,295 1135,270 1480,270 1515,235 1515,75 1465,25 80,25

## Silkscreen, mask and mechanical layers (free items; w line width, h text height)
Top Overlay:
  text "+" at 61,655.01 h40
  text "-" at 66,545.01 h40
  text "left" at 1001,515.01 h40
  text "R" at 51,320.01 h40
  text "right" at 956,226.67 h40
  text "L" at 51,123.16 h40
Bottom Overlay:
  text "VCC" at 246,689.99 h40 r180
  text "L-F" at 1251.68,599.99 h40 r180
  text "L-R" at 1571.68,599.99 h40 r180
  text "GND" at 246,591.57 h40 r180
  text "R-SWT" at 241,356.84 h40 r180
  text "N-SWT" at 241,258.42 h40 r180
  text "R-F" at 1255.11,229.99 h40 r180
  text "R-R" at 1575.11,229.99 h40 r180
  text "L-SWT" at 241,159.99 h40 r180
Board Shape:
  the board outline again, w20